# Altium PCB Central PCB.PcbDoc
Units mil, origin at the board's own origin, x right, y up, seen from the top; angles counter-clockwise.
Board outline 2000 x 1500 mil, 2 copper layers (Top Layer, Bottom Layer); 23 components, 9 nets, 76 pads, 3 vias.
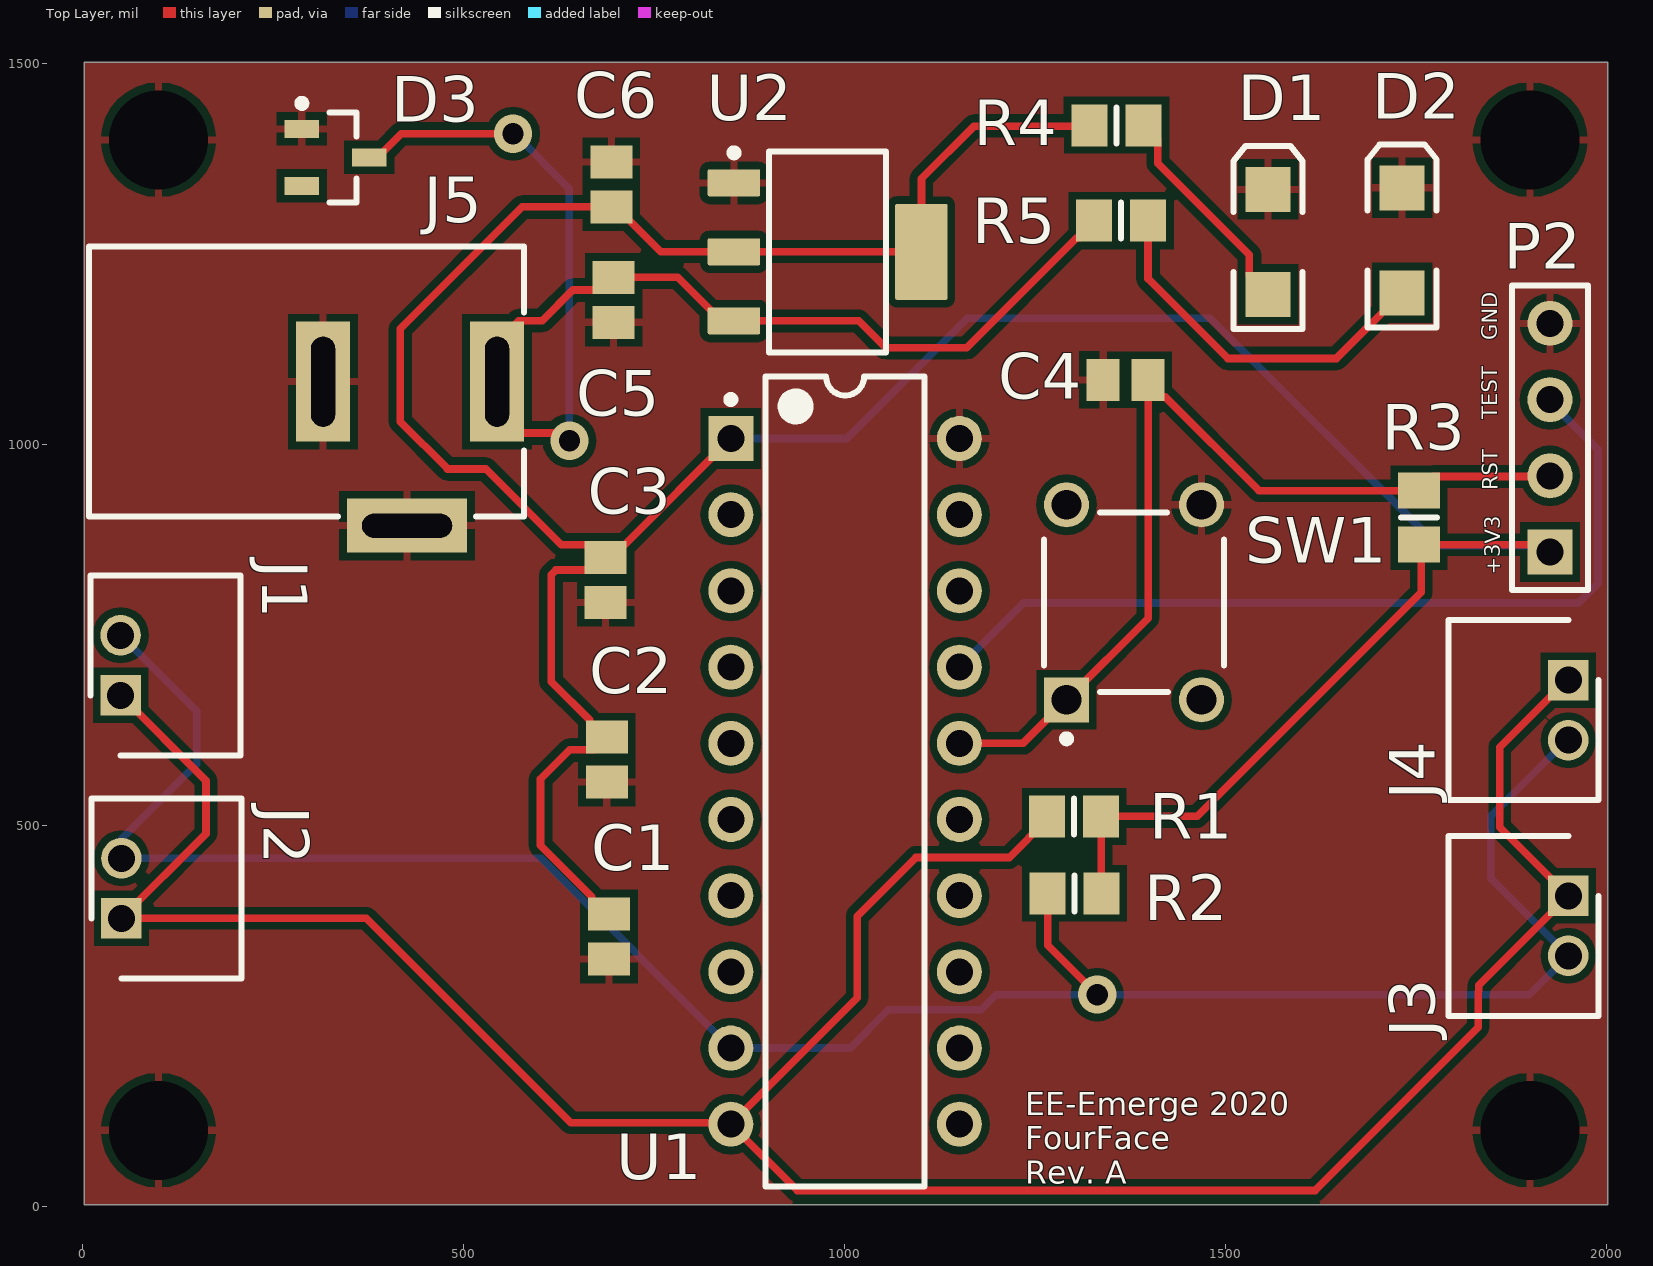
[diagram p0: Top Layer view]
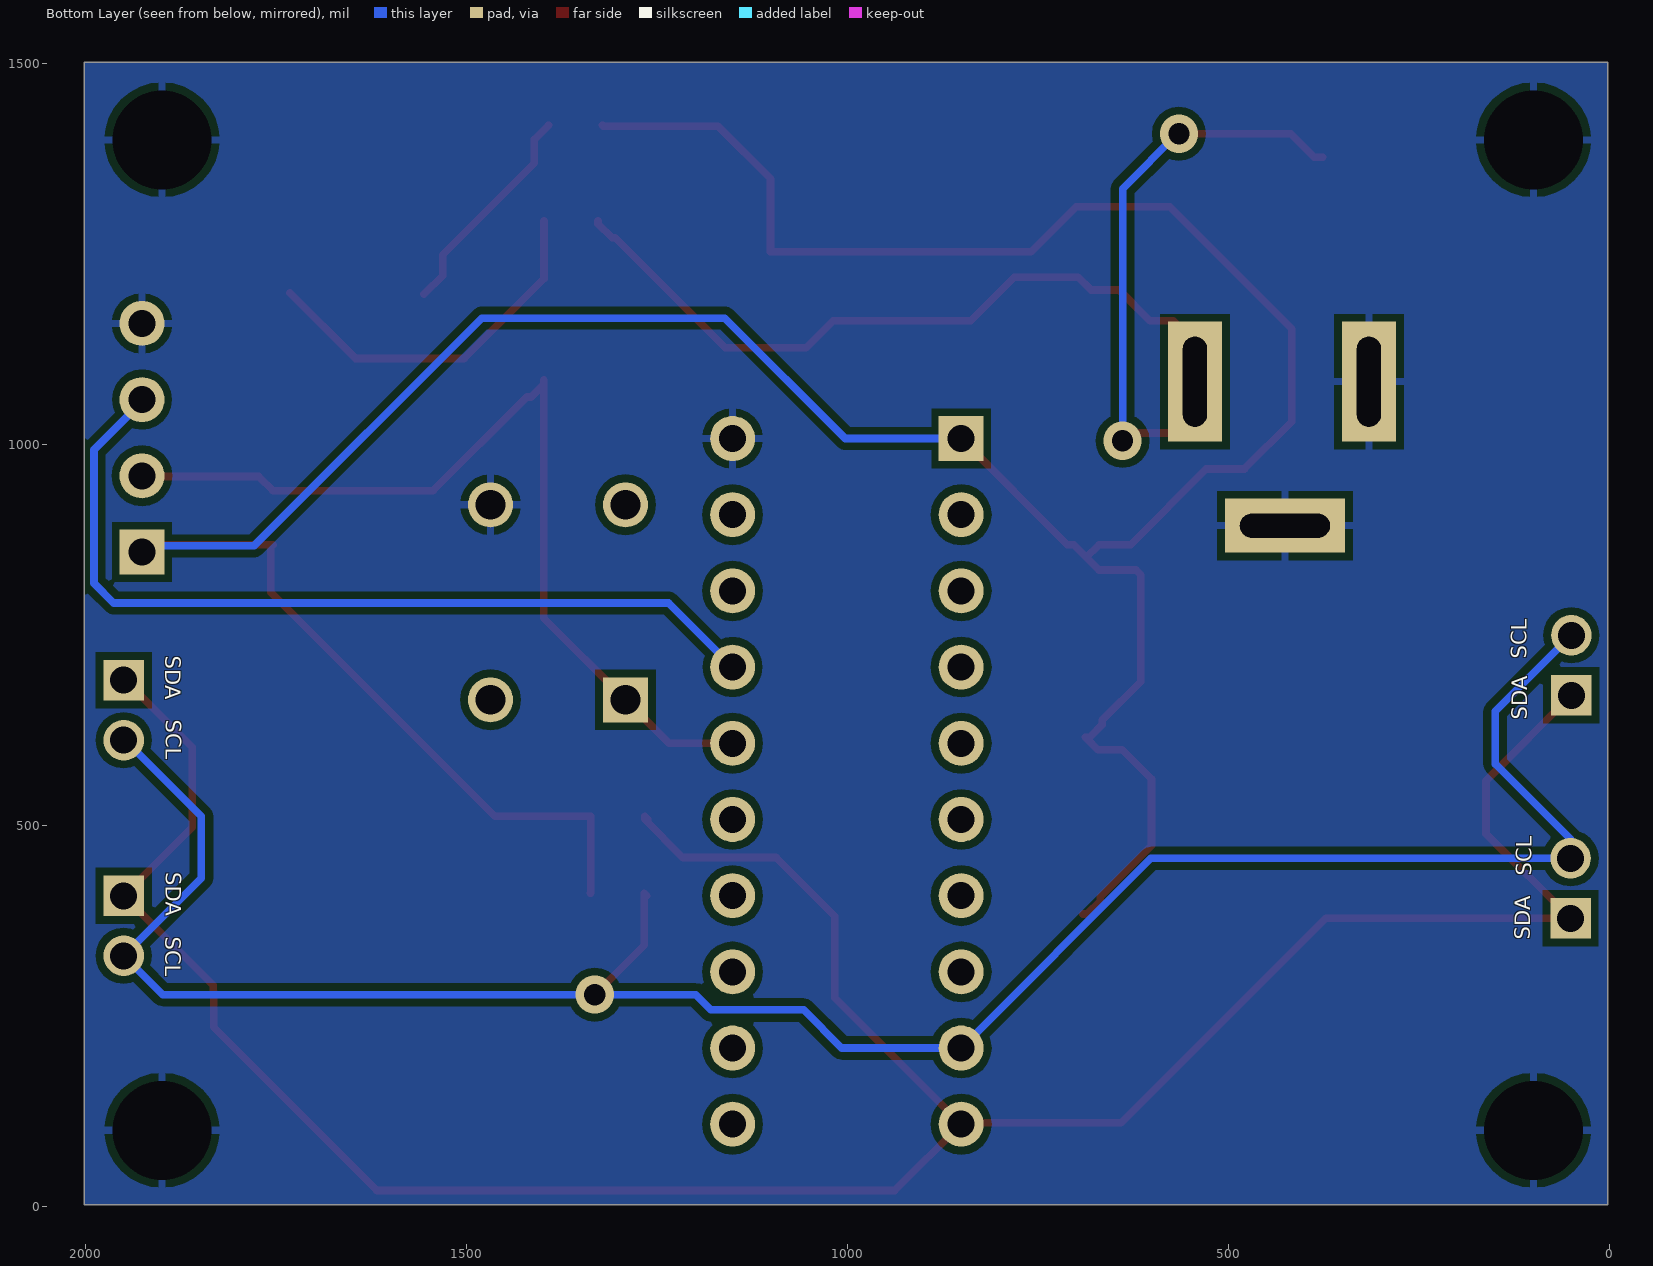
[diagram p1: Bottom Layer view, seen from below]

## Layer stack, top to bottom
Top Solder: solder mask 0.4, Solder Resist, Dk 3.5
Top Layer: signal copper 1.4
Dielectric 1: dielectric 12.6, FR-4, Dk 4.8
Bottom Layer: signal copper 1.4
Bottom Solder: solder mask 0.4, Solder Resist, Dk 3.5

## Board outline
2.29,1502 2002.29,1502 2002.29,2 2.29,2

## Design rules (kind name [scope] priority, off if disabled: settings)
Clearance [All] p1: gap=10 ignorepadtopadclearanceinfootprint=FALSE except(0: Arc-Hole Track-Hole SMDPad-Hole THPad-Hole Via-Hole Fill-Hole Poly-Hole Region-Hole Text-Hole)
PolygonConnect [All] p1: connectstyle=Relief reliefconductorwidth=10 reliefentries=4 polygonreliefangle="90 Angle" airgapwidth=10
RoutingVias [All] p1: holewidth=28 width=50 viastyle="Through Hole" minholewidth=28 minwidth=50 maxholewidth=28 maxwidth=50
SolderMaskExpansion [All] p1: expansion=4
Width [All] p1: maxlimit=10 minlimit=10 preferedwidth=10
30 further rules are at their usual default settings.

## Components (designator, comment, footprint, x,y, rotation, side; value= is the part's Value field where it differs from the comment)
C1 "Cap2" C0805 691.29,354.42 r270 top value=10uF
C2 "Cap2" C0805 688.29,586.42 r270 top value=1uF
C3 "Cap2" C0805 686.82,822.42 r270 top value=0.1uF
C4 "Cap2" C0805 1369.29,1085 r180 top value=1000pF
C5 "Cap2" C0805 697.29,1190 r270 top value=100uF
C6 "Cap2" C0805 694.29,1341.53 r90 top value=1uF
D1 "LED2" 3.2X1.6X1.1 1556.29,1266.1 r90 top
D2 "LED2" 3.2X1.6X1.1 1732.29,1268.1 r90 top
D3 "Diode BAS16" SOT-23_N 332.29,1377 r0 top
J1 "DF3A-2P-2DSA(10)" SHDR2W50P0X200_1X2_600X500X500P 50.29,670.95 r270 top
J2 "DF3A-2P-2DSA(10)" SHDR2W50P0X200_1X2_600X500X500P 51.29,378.26 r270 top
J3 "DF3A-2P-2DSA(10)" SHDR2W50P0X200_1X2_600X500X500P 1950.29,407.74 r90 top
J4 "DF3A-2P-2DSA(10)" SHDR2W50P0X200_1X2_600X500X500P 1950.29,690.74 r90 top
J5 "694106301002" 694106301002 294.29,1082.54 r270 top
P2 "Header 4" HDR1X4 1926.29,859 r90 top
R1 "Res3" 6-0805_N 1301.86,511.95 r180 top value=4.7K
R2 "Res3" 6-0805_N 1302.29,410.95 r180 top value=4.7K
R3 "Res3" 6-0805_N 1754.29,904 r90 top value=47K
R4 "Res3" 6-0805_N 1357.29,1419 r0 top value=390
R5 "Res3" 6-0805_N 1363.29,1294 r0 top value=390
SW1 "1825910-6" TECO-1825910-6_V 1380.29,793 r90 top
U1 "MSP430G2553IN20" N0020A 1001.16,557.95 r0 top
U2 "TLV1117LV33DCYR" DCY0004A_N 978.29,1253 r0 top

## Footprints (in the part's own frame and the unit in brackets; to place one, negate y for a bottom-side part, rotate by r counter-clockwise, add the part's x,y. Pads: shape width x height; smd on the part's side, far side on the other; paste and mask are expansions set on the pad)
3.2X1.6X1.1 [mm]
  rect 1.5x1.5 smd: 1(-1.75,0) 2(1.75,0)
  silkscreen extent -2.9,-1.15 3.2,1.15
6-0805_N [mm] "Chip Resistor, Body 2.0x1.2mm, IPC Medium Density"
  rect 1.2x1.4 smd: 1(-0.9,0) 2(0.9,0)
  silkscreen extent 0,-0.6 0,0.6, body extent -1.07,-0.7 1.07,0.7, height 0.7
694106301002 [mm] "DC Power Jack Right Angled(6.4)"
  rect 4x1.8 hole 0.8 slot 3 at 0 deg: 1(0,6.35) 2(0,0.55)
  rect 1.8x4 hole 0.8 slot 3 at 90 deg: 3(4.8,3.35)
  silkscreen extent -4.5,-7.25 4.5,7.25, body extent -4.5,-7.25 5,7.25, height 10.75
C0805 [mm] "Chip Capacitor, Body 2.0x1.3mm, IPC High Density"
  rect 1.1x1.4 smd: 1(-0.75,0) 2(0.75,0)
  body extent -1.1,-0.72 1.1,0.72, height 1.4
DCY0004A_N [mm] "SOT223, 4-Leads, Body 6.7x3.7mm, Pitch 2.3mm, IPC Medium Density"
  rrect11% 1.75x0.9 smd: 1(-3.125,2.3) 2(-3.125,0) 3(-3.125,-2.3)
  rrect6% 1.75x3.2 smd: 4(3.125,0)
  silkscreen extent -3.25,-3.35 1.95,3.42, body extent -3.5,-3.25 3.5,3.25, height 1.62
HDR1X4 [mm] "Connector; Header; 4 Position"
  rect 1.5x1.5 hole 0.9: 1(0,0)
  round 1.5 hole 0.9: 2(2.54,0) 3(5.08,0) 4(7.62,0)
  silkscreen extent -1.27,-1.27 8.89,1.27
N0020A [mm]
  rect 1.5x1.5 hole 0.9: 1(-3.81,11.43)
  round 1.5 hole 0.9: 2(-3.81,8.89) 3(-3.81,6.35) 4(-3.81,3.81) 5(-3.81,1.27) 6(-3.81,-1.27) 7(-3.81,-3.81) 8(-3.81,-6.35) 9(-3.81,-8.89) 10(-3.81,-11.43) 11(3.81,-11.43) 12(3.81,-8.89) 13(3.81,-6.35) 14(3.81,-3.81) 15(3.81,-1.27) 16(3.81,1.27) 17(3.81,3.81) 18(3.81,6.35) 19(3.81,8.89) 20(3.81,11.43)
  silkscreen extent -3.93,-13.5 2.65,13.5, body extent -3.95,-13.45 3.95,13.45, height 5.08
SHDR2W50P0X200_1X2_600X500X500P [mm]
  rect 1.35x1.35 hole 0.9: 1(0,0)
  round 1.35 hole 0.9: 2(-2,0)
  silkscreen extent -4,-1 2,4
SOT-23_N [mm] "SOT23, 3-Leads, Body 2.9x1.3mm, Pitch 0.95mm, Lead Span 2.5mm, IPC Medium Density"
  rect 1.15x0.6 smd: 1(-1.125,0.95) 2(-1.125,-0.95) 3(1.125,0)
  silkscreen extent -1.25,-1.5 0.7,1.92, body extent -0.7,-1.5 0.7,1.5, height 1.1
TECO-1825910-6_V [mm] "Switch, 4-Leads, Body 5.99x5.99mm"
  rect 1.5x1.5 hole 0.99: 1(-3.25,2.25)
  round 1.5 hole 0.99: 2(3.25,2.25) 3(-3.25,-2.25) 4(3.25,-2.25)
  silkscreen extent -4.67,-2.99 2.99,3, body extent -3,-2.99 2.99,3, height 5

## Part data
C1 C3 C4 C5 C6: "Capacitor", PackageDescription="Capacitor; 2 Leads", PackageReference=CAPR5-4X5, Published=23-Sep-2002, Publisher="Altium Limited"
C2: library part Cap2_4, "Capacitor", PackageDescription="Capacitor; 2 Leads", PackageReference=CAPR5-4X5, Published=23-Sep-2002, Publisher="Altium Limited"
D1 D2: "Typical RED, GREEN, YELLOW, AMBER GaAs LED", LatestRevisionDate=17-Jul-2002, LatestRevisionNote="Re-released for DXP Platform.", PackageDescription="SM LED; 2 Flat Leads", PackageReference=3.2X1.6X1.1, PackageVersion=Feb-2002, Published=8-Jun-2000, Publisher="Altium Limited"
D3: "Silicon Switching Diode for High-Speed Switching", ComponentLink1Description="Manufacturer Link", ComponentLink1URL=http://www.infineon.com/, ComponentLink2Description=Datasheet, ComponentLink2URL=http://www.infineon.com/upload/Document/cmc_upload/documents/012/5331/bas16series.pdf, DatasheetVersion=Oct-1999, LatestRevisionDate=29-May-2009, LatestRevisionNote="IPC-7351 Footprint Added.", Note="Pin 2 is not connected and not drawn.", PackageDescription="3-Pin SOT-23 Package 0.95 mm Pitch, 2.5 mm Lead Span", PackageReference=SOT-23, PackageVersion=Sep-2001, Published=21-Mar-2003, Publisher="Altium Limited"
J1 J2 J3 J4: "Connector", Manufacturer_Name=Hirose, Mouser Part Number=798-DF3A-2P-2DSA10, Datasheet Link=https://componentsearchengine.com/Datasheets/1/DF3A-2P-2DSA(10).pdf, Height=5mm, Manufacturer_Part_Number=DF3A-2P-2DSA(10), Mouser Price/Stock=https://www.mouser.com/Search/Refine.aspx?Keyword=798-DF3A-2P-2DSA10
J5: library part CMP-1502-00188-1, "DC Power Jack Connector WR-DC, Male, Right Angled, THT, 5 A, 24 V", Manufacturer="Wurth Elektronik", Operating Temperature=-40to85degC, Rated Current=5A, Working Voltage=24V, Datasheet URL=http://katalog.we-online.de/em/datasheet/6941xx301002.pdf, Gender=Male, Manufacturer URL=http://www.we-online.de, Mounting Technology=THT, Opening Diameter=6.4mm, Orientation=RightAngled, Package Reference=694106301002, Packaging=Bag, Part Number=694106301002, Plug Inner Diameter=2.05mm, Plug Outer Diameter=5.5mm, Publisher=WurthElektronik
P2: "Header, 4-Pin", LatestRevisionDate=17-Jul-2002, LatestRevisionNote="Re-released for DXP Platform.", Publisher="Altium Limited"
R1 R2 R3 R4 R5: "Resistor", LatestRevisionDate=29-May-2009, LatestRevisionNote="IPC-7351 Footprint Added.", PackageDescription="Chip Resistor", PackageReference=J1-0603, Published=8-Jun-2000, Publisher="Altium Limited"
SW1: library part CMP-1684-00021-1, "Tact Switch, SPST-NO, 0.05 A, -35 to 85 degC, 4-Pin THD, RoHS, Bulk", Actuator Color=Black, Contact Rating @ Voltage=0.05A@24VDC, Dielectric Strength=500VAC, Manufacturer="TE Connectivity", Maximum AC Voltage Rating=N/A, Maximum Contact Resistance=100mOhm, Maximum DC Voltage Rating=24V, Minimum Insulation Resistance=100MOhm, Operating Temperature=-35to85C, Package Description="4-Pin Through Hole Device, Body 5.99 x 5.99 mm, Pitch 6.5 mm", Package Reference=THD, Actuator Length=1.4mm, Actuator Material=PolybutyleneTerephthalate, Actuator Style=RoundButton, Base Material=N/A, Body Orientation=Straight, Bushing Type=Unthreaded, Contact Material=CopperAlloy, Contact Plating=Silver, Datasheet URL=http://www.te.com/commerce/DocumentDelivery/DDEController?Action=showdoc&DocId=Customer+Drawing%7F1825910%7FC9%7Fpdf%7FEnglish%7FENG_CD_1825910_C9.pdf%7F1825910-6, Datasheet Version="Rev. C9", Dimension=5.99x5mm, Electrical Life=100000Cycles, Family=1825910, Function=MomentaryContact, Housing Material=N/A, Illumination=N/R, Manufacturer URL=http://www.te.com, Mechanical Life=100000Cycles, Mounting=ThroughHole, Packaging=N/A, Part No=1825910-6, Pole Throw Configuration=SPST, Product Weight=N/A, RoHS=Yes, Seal Description=N/A, Seal Location=N/A, Switch Configuration=OFF(ON), Terminal Type=PCPins, Thread Size=N/R
U1: library part CMP-0365-00184-2, "16 MHz Mixed Signal Microcontroller with 16 KB Flash, 512 B SRAM and 24 GPIOs, -40 to 85 degC, 20-pin DIP (N), Pb-Free (RoHS)", Frequency(MHz)=16, Manufacturer="Texas Instruments", Temp Sensor=Yes, ADC="10-bit SAR", ADC Channels=8, Brown Out Reset=Yes, Cap touch I/O=Yes, Code_JEDEC=MS-001, Comparators=Yes, ComponentLink1Description="Manufacturer URL", ComponentLink1URL=http://www.ti.com/, ComponentLink2Description=Datasheet, ComponentLink2URL=http://www.ti.com/general/docs/lit/getliterature.tsp?genericPartNumber=MSP430G2553&fileType=pdf, ComponentLink3Description="Package Specification", ComponentLink3URL=http://www.ti.com/litv/pdf/mpds177g, DatasheetVersion=SLAS735G, Eco-Plan="Pb-Free (RoHS)", Flash(KB)=16, GPIO=24, Manufacturer 1="Texas Instruments", Manufacturer Part Number 1=MSP430G2553IN20, Mounting Technology="Through Hole", PackageDescription="20-Pin Plastic In-Line, Body 25.40 x 6.35 mm, Pitch 2.54 mm", PackageReference=N0020A, PackageVersion=4040049/E, PartNumber=MSP430G2553IN20, SRAM(B)=512, SubFamily="Value Line", Timers - 16-bit=2, USCI_A (UART/LIN/IrDA/SPI)=1, USCI_B (I2C & SPI)=1, Watchdog=Yes
U2: library part CMP-0395-00503-2, "Single Output LDO, 1 A, Fixed 3.3 V Output, 2 to 5.5 V Input, 4-pin SOT-223 (DCY), -40 to 125 degC, Green (RoHS & no Sb/Br)", Manufacturer="Texas Instruments", Accuracy(%)=2, Code_JEDEC=TO-261, ComponentLink1Description="Manufacturer URL", ComponentLink1URL=http://www.ti.com/, ComponentLink2Description=Datasheet, ComponentLink2URL=http://www.ti.com/general/docs/lit/getliterature.tsp?genericPartNumber=TLV1117LV33&fileType=pdf, ComponentLink3Description="Package Specification", ComponentLink3URL=http://www.ti.com/litv/pdf/mpds094a, DatasheetVersion=SBVS160A, Eco-Plan="Green (RoHS & no Sb/Br)", Fixed Output Options(V)=3.3, Iout(Max)(A)=1, Iq(Typ)(mA)=0.05, Mounting Technology="Surface Mount", PackageDescription="4-Pin Plastic Small Outline, Body 3.5 x 6.5 mm, Pitch 2.3 mm", PackageReference=DCY0004A, PackageVersion=4202506/B, PartNumber=TLV1117LV33DCYR, SubFamily="Single Channel LDO", Vdo(Typ)(mV)=1200, Vin(Max)(V)=5.5, Vin(Min)(V)=2, Vout Adj(Max)(V)=3.3, Vout Adj(Min)(V)=3.3

## Free pads (board coordinates)
  round 60 hole 130: 8(100,100) 8(100,1400) 8(1900,100) 8(1900,1400)

## Via types
v1: diameter 50, hole 28, Top Layer to Bottom Layer, 3 vias

## Nets (pads, with @x,y where several pads share a name; then routed paths per layer and width w, separated by ;. In a path a pad name is that pad's centre, name@x,y a point inside that pad or via, vN(x,y) a via of type N, cw(c..) or ccw(c..) an arc to the next point about the centre after c; other vN are vias at no path point)
+3V3: C1.1 C2.1 C3.1 C6.1 P2.1 R1.1 R2.1 R3.1 R4.1 U1.1 U2.2 U2.4 | length 4620.5
  Top Layer w10: C1.1 685.39,383.95 668.73,400.6 668.73,406.51 601.29,473.95 601.29,561 639.59,599.3 671.64,599.3 685.34,613 C2.1 682.39,615.95 665.73,632.6 665.73,638.51 615.29,688.95 615.29,829.14 621.45,835.3 670.17,835.3 C3.1 ; U1.1 711.81,868.6 703.47,868.6 C3.1 ; R4.1 1320.86,1418 1170.29,1418 1101.32,1349.03 U2.4 U2.2 759.2,1253 700.2,1312 C6.1 577.29,1312 417.29,1152 417.29,1030 479.29,968 529.29,968 628.69,868.6 670.17,868.6 C3.1 ; R2.1 1337.29,411.38 R1.1 1463.24,511.95 1757.29,806 1757.29,865.57 R3.1 1916.72,868.57 P2.1
  Bottom Layer w10: U1.1 1003.24,1007.95 1161.29,1166 1480.29,1166 1779.29,867 1918.29,867 P2.1
+5V: C5.1 D3.3 J5.1 R5.1 U2.3 | length 1765.8
  Top Layer w10: D3.3 387.41,1377 418.41,1408 v1(565.29,1408) ; J5.1@542.29,1082.54 542.29,1132.31 572.72,1162.74 603.66,1162.74 643.8,1202.87 680.64,1202.87 C5.1 781.45,1219.53 838.53,1162.45 U2.3 1018.84,1162.45 1054.29,1127 1160.86,1127 1305.3,1271.44 1309.24,1271.44 1327.86,1290.06 R5.1 ; J5.1 544.29,1045.69 574.72,1015.26 618.21,1015.26 628.47,1005 v1(639.29,1005)
  Bottom Layer w10: v1@566.29,1409 639.29,1336 v1(639.29,1005)
GND: C1.2 C2.2 C3.2 C4.2 C5.2 C6.2 D1.2 D2.2 D3.1 J5.2 J5.3 P2.4 pad.8 SW1.4 U1.20 U2.1
NetD1_1: D1.1 R4.2 | length 289.5
  Top Layer w10: R4.2 1411.35,1400.38 1411.35,1369.3 1531.76,1248.88 1531.76,1221.73 D1.1
NetD2_1: D2.1 R5.2 | length 489
  Top Layer w10: R5.2 1398.72,1217.57 1503.29,1113 1646.09,1113 D2.1
RST: C4.1 P2.2 R3.2 SW1.1 U1.16 | length 1221.9
  Top Layer w10: U1.16 1234.61,607.95 SW1.1 1398.82,772.16 C4.1@1398.82,1079.09 ; C4.1 C4.1@1398.82,1079.09 ; P2.2 1925.35,958.06 1772.91,958.06 R3.2 1544.39,939.43 1421.38,1062.44 1415.47,1062.44 C4.1@1398.82,1079.09
SCL: J1.2 J2.2 J3.2 J4.2 R2.2 U1.9 | length 2958.2
  Top Layer w10: R2.2@1263.86,407.95 R2.2 1266.86,343.14 v1(1332,278)
  Bottom Layer w10: J1.2 150.29,649.69 150.29,580.81 51.29,481.81 J2.2 602.11,457 U1.9 1007.95,207.95 1058,258 1179.59,258 1199.59,278 v1(1332,278) 1899.29,278 J3.2 1848.29,431 1848.29,511.95 J4.2@1948.29,611.95
SDA: J1.1 J2.1 J3.1 J4.1 R1.2 U1.10 | length 3634.2
  Top Layer w10: J1.1 162.29,558.95 162.29,489.26 J2.1 372.74,378.26 641,110 849.11,110 U1.10 ; R1.2@1262.43,507.95 R1.2 1266.43,508.01 1216.41,458 1094,458 1017,381 1017,273.79 U1.10 ; J4.1@1948.29,690.69 1860.29,602.69 1860.29,497.74 J3.1 1833,290.45 1833,283 1832,282 1832,235 1618,21 938.11,21 U1.10
TEST: P2.3 U1.17 | length 1150.8
  Bottom Layer w10: U1.17 1235.21,792 1963.29,792 1989.29,818 1989.29,993 1926.29,1056 P2.3
pads on no net: D3.2 SW1.2 SW1.3 U1.2 U1.3 U1.4 U1.5 U1.6 U1.7 U1.8 U1.11 U1.12 U1.13 U1.14 U1.15 U1.18 U1.19

## Polygon pours and split planes (outlines as drawn)
GND on Top Layer "Top Layer-GND" (solid, pour order 0): 2.29,1502 2.29,2 2002.29,2 2002.29,1502
GND on Bottom Layer "Bottom Layer-GND" (solid, pour order 2): 2.29,1502 2.29,2 2002.29,2 2002.29,1502

## Silkscreen, mask and mechanical layers (free items; w line width, h text height)
Top Overlay:
  text "GND" at 1857,1137 h20 r90
  text "TEST" at 1857,1033 h20 r90
  text "RST" at 1858,940 h20 r90
  text "+3V3" at 1861,829 h20 r90
  text "EE-Emerge 2020 / FourFace / Rev. A" at 1237.29,30 h30
Bottom Overlay:
  text "SDA" at 1896,723 h20 r90
  text "SCL" at 109,719 h20 r270
  text "SDA" at 108,639 h20 r270
  text "SCL" at 1895,639 h20 r90
  text "SDA" at 1895,439 h20 r90
  text "SCL" at 102,434 h20 r270
  text "SCL" at 1896,354 h20 r90
  text "SDA" at 104,350 h20 r270